# Altium PCB MSXIV_DC-DC_Converter.PcbDoc
Units mil, origin at the board's own origin, x right, y up, seen from the top; angles counter-clockwise.
Board outline 6574.8 x 2484.25 mil, 2 copper layers (Top Layer, Bottom Layer); 34 components, 17 nets, 153 pads, 173 vias.
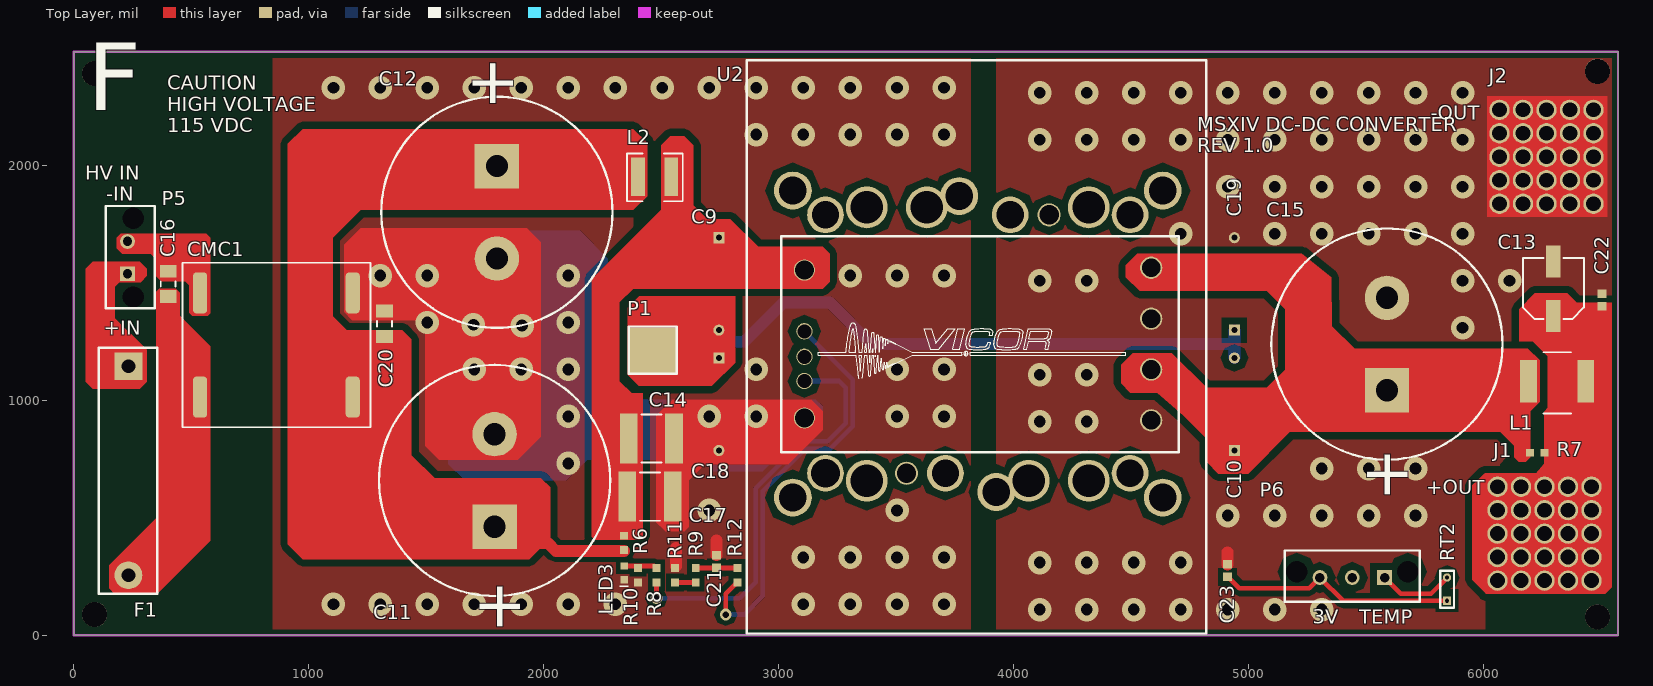
[diagram p0: Top Layer view]
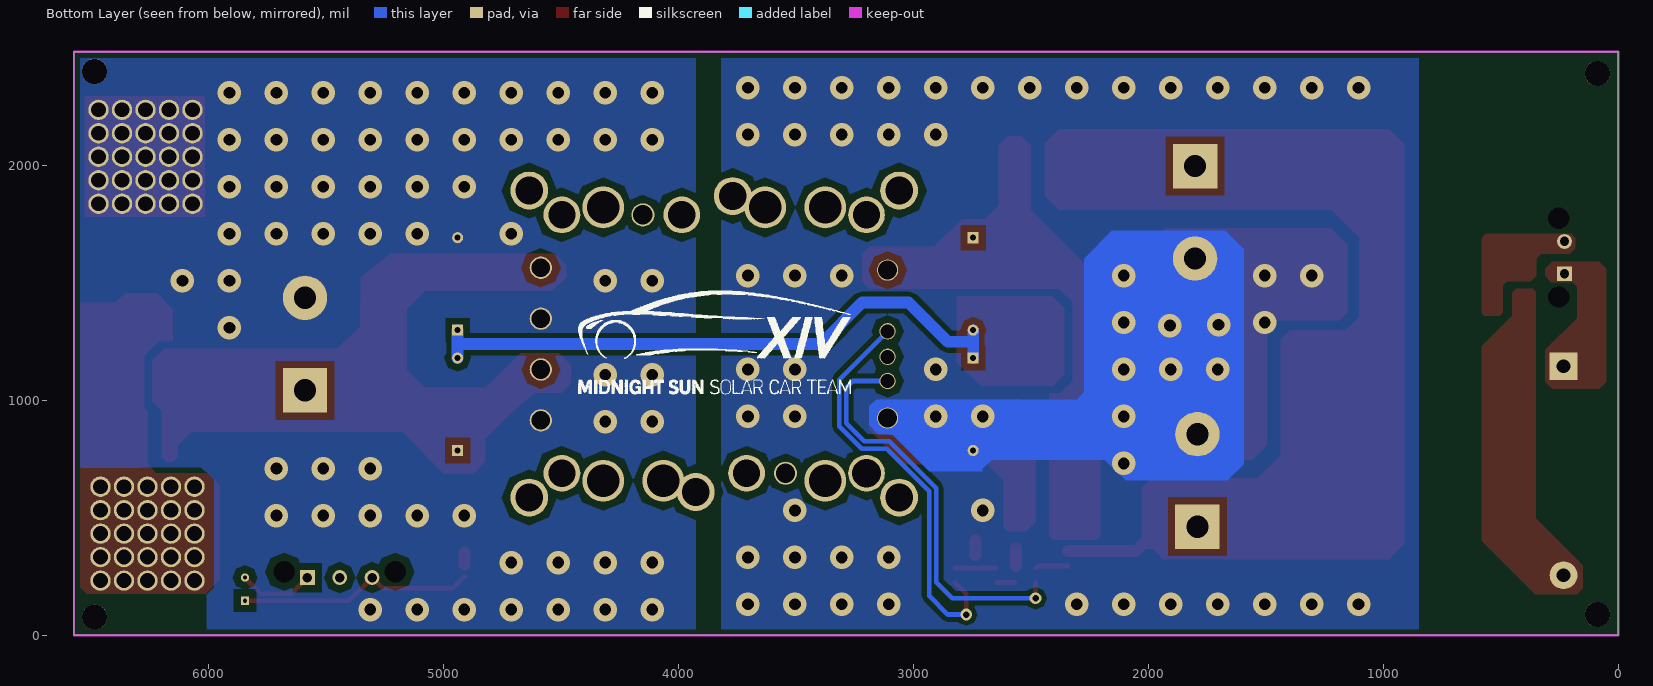
[diagram p1: Bottom Layer view, seen from below]
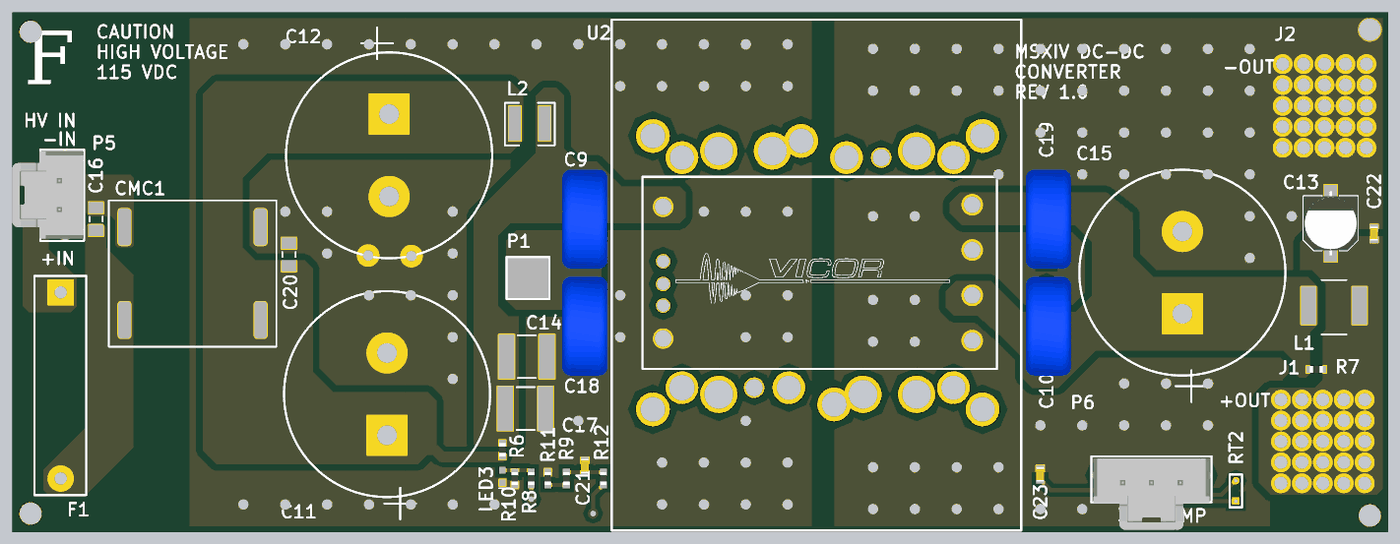
[diagram p2: 3D render of the assembled board from above, using the file's embedded part models]

## Layer stack, top to bottom
Top Solder: solder mask 0.4, Solder Resist, Dk 3.5
Top Layer: signal copper 1.4
Dielectric 1: dielectric 12.6, FR-4, Dk 4.8
Bottom Layer: signal copper 1.4
Bottom Solder: solder mask 0.4, Solder Resist, Dk 3.5

## Board outline
0,0 0,2484.25 6574.8,2484.25 6574.8,0

## Design rules (kind name [scope] priority, off if disabled: settings)
Clearance "Stitching HV_GND" [IsStitchingVia and InNet('HV_GND') vs (IsVia and (Not IsStitchingVia)) Or IsPad] p1: gap=5 ignorepadtopadclearanceinfootprint=FALSE
Clearance [All] p2: gap=10 ignorepadtopadclearanceinfootprint=FALSE except(0: Arc-Hole Track-Hole SMDPad-Hole THPad-Hole Via-Hole Fill-Hole Poly-Hole Region-Hole Text-Hole; 20: Arc-Fill Arc-Poly Arc-Region Track-Fill Track-Poly Track-Region SMDPad-Fill SMDPad-Poly SMDPad-Region Via-Fill Via-Poly Via-Region; 30: THPad-Fill THPad-Poly THPad-Region Fill-Fill Fill-Poly Fill-Region Poly-Poly Poly-Region Region-Region)
Height [All] p1: minheight=0 maxheight=1968.5 prefheight=500
PolygonConnect [All] p1: connectstyle=Direct reliefconductorwidth=10 reliefentries=4 polygonreliefangle="90 Angle" airgapwidth=10
RoutingVias [All] p1: holewidth=28 width=50 viastyle="Through Hole" minholewidth=28 minwidth=50 maxholewidth=28 maxwidth=50
SolderMaskExpansion [All] p1: expansion=4
Width [All] p1: maxlimit=100 minlimit=10 preferedwidth=10 minimp=50.000000 maximp=50.000000 favimp=50.000000
29 further rules are at their usual default settings.

## Classes and differential pairs
net class HV: HV_GND NetC9_1 NetC11_1 NetF1_1
net class 20A: GND NetC10_1 NetC13_1
net class 5A: HV_GND NetC9_1 NetC11_1 NetF1_1

## Components (designator, comment, footprint, x,y, rotation, side; value= is the part's Value field where it differs from the comment)
C9 "CAP CER 4700PF 400VAC Y5V RADIAL" "CAP 4700PF 400VAC Y5V RADIAL" 2746.06,1692.91 r270 top value=4700pF
C10 "CAP CER 4700PF 400VAC Y5V RADIAL" "CAP 4700PF 400VAC Y5V RADIAL" 4940.94,787.4 r90 top value=4700pF
C11 "CAP ALUM 1000UF 20% 200V SNAP" "CAP ALUM 1000uF 200V" 1791.34,462.6 r90 top
C12 "CAP ALUM 1000UF 20% 200V SNAP" "CAP ALUM 1000uF 200V" 1801.18,1998.03 r270 top
C13 "EEE-1HA4R7NP" "CAP ALUM 6.3MM RADIAL SMD" 6299.21,1476.38 r90 top
C14 "CAP CER 1UF 200V X7R 2220" "CAP, 2220" 2458.66,838.58 r0 top
C15 "CAP ALUM 15000UF 20% 25V SNAP" "CAP ALUM 1000uF 200V" 5590.55,1043.31 r90 top
C16 "CAP CER 0.1UF 200V X7R 1206" "CAP, 1206" 401.57,1496.06 r90 top
C17 "CAP CER 1UF 200V X7R 2220" "CAP, 2220" 2452.76,590.55 r0 top
C18 "CAP CER 4700PF 400VAC Y5V RADIAL" "CAP 4700PF 400VAC Y5V RADIAL" 2746.06,1181.1 r270 top value=4700pF
C19 "CAP CER 4700PF 400VAC Y5V RADIAL" "CAP 4700PF 400VAC Y5V RADIAL" 4940.94,1299.21 r90 top value=4700pF
C20 "CAP CER 0.1UF 200V X7R 1206" "CAP, 1206" 1322.83,1326.77 r90 top
C21 "CAP CER 0.1UF 50V 10% X7R 0603" "CAP, 0603" 2736.22,314.96 r90 top
C22 "CAP CER 10uF 25V 20% X5R 0603" "CAP, 0603" 6505.91,1427.17 r90 top
C23 "CAP CER 0.1UF 50V 10% X7R 0603" "CAP, 0603" 4911.42,275.59 r90 top
CMC1 "CM Choke" "LCCI 50 Common mode choke" 862.2,1236.22 r0 top
F1 "FUSE 420VAC/DC 5X20 FA 8A" "FUSE 420VAC/DC 5X20 FA 8A" 232.28,1145.67 r0 top
J1 "TERM PWR ELEMENT SHANK M8 25PIN" "TERM PWR ELEMENT SHANK M8 25PIN" 6461.42,533.07 r0 top
J2 "TERM PWR ELEMENT SHANK M8 25PIN" "TERM PWR ELEMENT SHANK M8 25PIN" 6469.69,2137.4 r0 top
L1 "IND 820NH 16A 6 MOHM SMD" "IND 820NH 16A 6 MOHM SMD" 6192.91,1082.68 r0 top
L2 "IND 1UH 5A 12MOHM SMD" "IND 1UH 5A 12MOHM SMD" 2372.05,1870.08 r0 top
LED3 "LED GREEN CLEAR 2V 0603" LED_0603 2342.13,293.31 r270 top
P1 "5mm PAD" "5MM PAD" 2464.57,1212.6 r0 top
P5 "CONN 2POS ULTRA-FIT 0.138\"" "CONN, 2POS ULTRA-FIT" 228.35,1539.37 r90 top
P6 "CONN 3POS ULTRA-FIT 0.138\"" "CONN, 3POS ULTRA-FIT" 5580.71,246.06 r180 top
R6 "RES 1 OHM 5% 1/10W 0603" "RES, 0603" 2342.52,393.7 r90 top
R7 "RES 1 OHM 5% 1/10W 0603" "RES, 0603" 6230.31,777.56 r0 top
R8 "RES 330 OHM 1% 1/10W 0603" "RES, 0603" 2480.31,255.91 r90 top
R9 "RES 10K OHM 1% 1/10W 0603" "RES, 0603" 2647.64,255.91 r270 top
R10 "RES 54.9K OHM 1% 1/10W 0603" "RES, 0603" 2401.57,255.91 r270 top
R11 "RES 15.6K OHM 0.1% 1/10W 0402" "RES, 0603" 2559.06,255.91 r270 top
R12 "RES 0.0 OHM 1/4W 0603" "RES, 0603" 2824.8,255.91 r270 top
RT2 "10K NTC" "NTC THERMISTOR BEAD" 5846.46,147.64 r90 top
U2 "DCDC VICOR CONVERTER 15V 240W - DCM3623TA5N17B4T70" "IC, DCDC CONVERTER DCM3623TA5N17B4T70" 3848.43,1240.16 r0 top locked

## Footprints (in the part's own frame and the unit in brackets; to place one, negate y for a bottom-side part, rotate by r counter-clockwise, add the part's x,y. Pads: shape width x height; smd on the part's side, far side on the other; paste and mask are expansions set on the pad)
"5MM PAD" [mm] "5mmx5mm Pad for EMI GROUND"
  rect 5x5 smd: 1(0,0)
  silkscreen extent -2.6,-2.5 2.6,2.6
"CAP 4700PF 400VAC Y5V RADIAL" [mm] "4700pF ±20% 400VAC Ceramic Capacitor Y5V (F) Radial, Disc"
  rect 1.2x1.2 hole 0.65: 1(0,0)
  round 1.2 hole 0.65: 2(10,0)
  body extent -1,-3 11,2.5, height 16
"CAP ALUM 6.3MM RADIAL SMD" [mm] "Aluminum Electrolytic Capacitor, Body 6.50x6.50x5.50mm, IPC Low Density"
  rect 3.45x1.55 smd: 1(-2.95,0) 2(2.95,0)
  silkscreen extent -3.3,-3.3 3.3,3.3, body extent -3.9,-3.3 3.9,3.3, height 5.5
"CAP ALUM 1000uF 200V" [mm] "Footprint for 1000µF 200V Aluminum Electrolytic Capacitors Radial, Can - Snap-In 199mOhm @ 120Hz 3000 Hrs @ 85°C"
  rect 4.8x4.8 hole 2.4: 1(0,0)
  round 4.8 hole 2.4: 2(10,0)
  silkscreen extent -7.5,-12.5 17.5,12.5, body extent -8,-12.99 18,13, height 45
"CAP, 0603" [mm] "Chip Capacitor, 2-Leads, Body 1.60x0.81mm, IPC Medium Density"
  rect 0.9x1 smd mask+0.076: 1(-0.675,0) 2(0.675,0)
  body extent -0.87,-0.48 0.87,0.48, height 0.9
"CAP, 1206" [mm] "Chip Capacitor, 2-Leads, Body 3.20x1.60mm, IPC Medium Density"
  rect 1.4x1.8 smd: 1(-1.375,0) 2(1.375,0)
  silkscreen extent -0.3,-0.8 0.3,0.8, body extent -1.68,-0.87 1.67,0.87, height 1.8
"CAP, 2220" [mm] "Chip Capacitor, 2-Leads, Body 5.70x5.00mm, IPC Medium Density"
  rect 1.9x5.4 smd: 1(-2.45,0) 2(2.45,0)
  silkscreen extent -1.1,-2.6 1.1,2.6, body extent -3.05,-2.7 3.05,2.7, height 2.3
"CONN, 2POS ULTRA-FIT" [mm] "2 Positions Header, Shrouded Connector 0.138\" (3.50mm) Through Hole Gold"
  rect 1.6x1.6 hole 1.02: 1(0,0)
  round 1.6 hole 1.02: 2(3.5,0)
  round 1.6 hole 2.3: ""(-2.5,-0.63) ""(6,-0.63)
  silkscreen extent -3.74,-2.93 7.33,2.37, body extent -3.48,-2.87 7.12,5.79, height 13.85
"CONN, 3POS ULTRA-FIT" [mm]
  rect 1.6x1.6 hole 1.02: 1(0,0)
  round 1.6 hole 1.02: 2(3.5,0) 3(7,0)
  round 0 hole 2.3: ""(-2.5,-0.63) ""(9.5,-0.63)
  silkscreen extent -3.8,-2.93 10.8,2.62, body extent -3.55,-2.67 10.55,5.99, height 13.85
"FUSE 420VAC/DC 5X20 FA 8A" [mm] "8A 420V AC 420V DC Fuse Cartridge, Ceramic Holder Cartridge, Non-Standard"
  rect 3x3 hole 1.5: 1(0,0)
  round 3 hole 1.5: 2(0,-22.6)
  silkscreen extent -3.2,-24.6 3.1,2, body extent -3.2,-24.6 3.1,2, height 8.13
"IC, DCDC CONVERTER DCM3623TA5N17B4T70" [mm]
  round 2.28 hole 2.03: A1(-18.75,8) E1(-18.75,-8)
  round 2.41 hole 2.03: A'2(18.75,8.25) B'2(18.75,2.75) C'2(18.75,-2.75) D'2(18.75,-8.25)
  round 1.77 hole 1.52: B1(-18.75,1.38) C1(-18.75,-1.38) D1(-18.75,-4)
  round 4.1 hole 3: ""(-20,-16.6) ""(-20,16.6) ""(-2,16) ""(2,-16) ""(20,-16.6) ""(20,16.6)
  round 2.5 hole 3.1 unplated: ""(-16.47,-13.97)
  round 3.97 hole 2.95: ""(-16.47,-13.97) ""(-16.47,13.97) ""(-3.5,-13.97) ""(3.5,13.97) ""(16.47,-13.97) ""(16.47,13.97)
  round 4.52 hole 3.5: ""(-12,-14.78) ""(-12,14.78) ""(-12,14.78) ""(-5.5,14.78) ""(5.5,-14.78) ""(12,-14.78) ""(12,14.78)
  round 2.5 hole 2.1: ""(-7.71,-13.97) ""(7.71,13.97)
  silkscreen extent -25,-31.3 24.7,30.7, body extent -21.25,-11.7 21.75,11.64, height 8
"IND 1UH 5A 12MOHM SMD" [mm] "IND 1UH 5A 12MOHM SMD -Semi-shielded"
  rect 1.5x4.2 smd: 1(0.75,2.1) 2(4.35,2.1)
  silkscreen extent -0.45,-0.55 5.6,4.62
"IND 820NH 16A 6 MOHM SMD" [mm] "820nH Shielded Molded Inductor 16A 6mOhm Max Nonstandard"
  rect 1.8x4.6 smd: 1(0,0) 2(6.2,0)
  silkscreen extent 1.6,-3.51 4.6,3.11, body extent -0.6,-3.6 6.8,3.2, height 3
"LCCI 50 Common mode choke" [mil] "5.6A CMC 18mm x20mm x 10mm"
  rrect50% 60x175 smd: 1(-325,-222) 2(325,-222) 3(-325,222) 4(325,222)
  silkscreen extent -400,-350 400,350, body extent -400,-350 400,350, height 390
LED_0603 [mm]
  rect 0.8x0.8 smd: 1(-0.05,0.01) 2(1.45,0.01)
  silkscreen extent 2.13,-0.46 2.13,0.45, body extent -0.09,-0.39 1.51,0.41, height 0.8
"NTC THERMISTOR BEAD" [mm] "NTC Thermistor 10k Bead"
  rect 0.9x0.9 hole 0.45: 1(0,0)
  round 0.9 hole 0.45: 2(2.5,0)
  silkscreen extent -0.75,-0.75 3.25,0.75
"RES, 0603" [mm] "Chip Resistor, 2-Leads, Body 1.60x0.80mm, IPC Medium Density"
  rect 0.85x0.85 smd: 1(-0.775,0) 2(0.775,0)
  body extent -0.8,-0.4 0.8,0.4, height 0.55
"TERM PWR ELEMENT SHANK M8 25PIN" [mm] "25 Pin Shank Terminal M8 Through Hole"
  round 2.2 hole 1.6: 1(-10.16,-7.62) 1(-10.16,-5.08) 1(-10.16,-2.54) 1(-10.16,0) 1(-10.16,2.54) 1(-7.62,-7.62) 1(-7.62,-5.08) 1(-7.62,-2.54) 1(-7.62,0) 1(-7.62,2.54) 1(-5.08,-7.62) 1(-5.08,-5.08) 1(-5.08,-2.54) 1(-5.08,0) 1(-5.08,2.54) 1(-2.54,-7.62) 1(-2.54,-5.08) 1(-2.54,-2.54) 1(-2.54,0) 1(-2.54,2.54) 1(0,-7.62) 1(0,-5.08) 1(0,-2.54) 1(0,0) 1(0,2.54)
  Top Layer region: -11.5,4 1.5,4 1.5,-9 -11.5,-9
  silkscreen extent -12,4 -12,4

## Part data
C9 C10 C18 C19: "4700pF ±20% 400VAC Ceramic Capacitor Y5V (F) Radial, Disc", Manufacturer=KEMET, Manufacturer Part Number=C951U472MVVDBA7317, Operating Temperature="-40°C ~ 125°C", Package / Case="Radial, Disc", Ratings="X1, Y1", Supplier Part Number 1=399-9517-1-ND, Temperature Coefficient="Y5V (F)", Tolerance=±20%, Voltage - Rated=400VAC, Applications=Safety, Category=Capacitors, ComponentLink1Description=https://search.kemet.com/component-edge/download/datasheet/C951U472MVVDBA7317.pdf, ComponentLink1URL=https://search.kemet.com/component-edge/download/datasheet/C951U472MVVDBA7317.pdf, Failure Rate=-, Features=-, Height - Seated (Max)=-, Lead Spacing="0.394\" (10.00mm)", Lead Style="Formed Leads - Kinked", Mounting Type="Through Hole", Packaging="Cut Tape (CT)", Part Status=Active, Pricing 1="1=1.12, 10=0.795, 100=0.5234, 500=0.38772 (CAD)", RoHS="RoHS Compliant", Size / Dimension="0.472\" Dia (12.00mm)", Stock 1=9713, Supplier 1=Digi-Key, Thickness (Max)=-
C11 C12: "CAP RADIAL ALUM 1000UF 20% 200V SNAP", Capacitance=1000µF, ESR (Equivalent Series Resistance)="199mOhm @ 120Hz", Manufacturer 1="Cornell Dubilier Electronics (CDE)", Manufacturer Part Number 1=SLPX102M200C4P3, Package / Case="Radial, Can - Snap-In", Supplier Part Number 1=338-1557-ND, Tolerance=±20%, Voltage - Rated=200V, Mounting Type="Through Hole", Polarization=Polar, Supplier 1=Digi-Key
C13: library part "CAP ALUM 4.7UF 20% 50V SMD", "4.7µF 50V Aluminum Electrolytic Capacitors Radial, Can - SMD 2000 Hrs @ 85°C", Capacitance=4.7uF, Case/Package=Radial, Manufacturer 1=Panasonic, Max Operating Temperature=85°C, Min Operating Temperature=-40°C, Package Quantity=1, Ripple Current=31mA, Supplier Part Number 1=PCE4304CT-ND, Tolerance=20%, Voltage Rating=50V, ComponentLink1Description=https://datasheet.ciiva.com/46374/aba0000ce2-46374373.pdf, ComponentLink1URL=https://datasheet.ciiva.com/46374/aba0000ce2-46374373.pdf, ComponentLink2Description=https://datasheet.ciiva.com/14600/70255710-14600343.pdf, ComponentLink2URL=https://datasheet.ciiva.com/14600/70255710-14600343.pdf, ComponentLink3Description=https://datasheet.ciiva.com/17536/aba0000ce2-17536647.pdf, ComponentLink3URL=https://datasheet.ciiva.com/17536/aba0000ce2-17536647.pdf, ComponentLink4Description=https://datasheet.ciiva.com/24027/aba0000ce2-40801-24027083.pdf, ComponentLink4URL=https://datasheet.ciiva.com/24027/aba0000ce2-40801-24027083.pdf, ComponentLink5Description=https://datasheet.ciiva.com/31414/aba0000ce2-31414684.pdf, ComponentLink5URL=https://datasheet.ciiva.com/31414/aba0000ce2-31414684.pdf, ComponentLink6Description=https://datasheet.ciiva.com/14606/70255710-14606079.pdf, ComponentLink6URL=https://datasheet.ciiva.com/14606/70255710-14606079.pdf, Description 1="CAPACITOR ALUM ELEC, 4.7UF, 50V, 20%, SMD", Diameter=6.3mm, Height=5.4mm, Height - Seated (Max)=0.213inch, Lead Free="Lead Free", Length=5.5mm, Life (Hours)=2000Hour, Manufacturer Part Number 1=EEE-1HA4R7NP, Mount="Surface Mount,PCB", Packaging="Tape and Reel", Pricing 1="1=0.43, 10=0.302, 100=0.1986, 500=0.1471 (USD)", Radiation Hardening=No, REACH SVHC="No SVHC", Ripple Current (AC)=31mA, Stock 1=19771, Supplier 1=Digi-Key, Termination=SMD/SMT, Voltage Rating (DC)=50V, Width=650um
C14 C17: "1µF ±10% 200V Ceramic Capacitor X7R 2220 (5750 Metric)", Capacitance=1µF, Manufacturer="Murata Electronics", Manufacturer Part Number 1=GRM55DR72D105KW01L, Package / Case="2220 (5750 Metric)", Supplier Part Number 1=490-14683-1-ND, Temperature Coefficient=X7R, Tolerance=±10%, Voltage - Rated=200V, Mounting Type 1="Surface Mount, MLCC", Size / Dimension="0.224\" L x 0.197\" W (5.70mm x 5.00mm)", Supplier 1=Digi-Key
C15: "15000µF 25V Aluminum Electrolytic Capacitors Radial, Can - Snap-In 40mOhm 3000 Hrs @ 105°C", Capacitance=15000µF, Manufacturer="Cornell Dubilier Electronics (CDE)", Manufacturer Part Number=SLP153M025C4P3, Supplier Part Number 1=338-1470-ND, Tolerance=±20%, Voltage - Rated=25V, Parameter 1="0.984\" Dia (25.00mm)", Size / Dimension="0.984\" Dia (25.00mm)", Supplier 1=Digi-Key
C16 C20: Capacitance=0.1µF, Manufacturer 1=Manufacturer, Manufacturer Part Number 1=885342208002, Package / Case="1206 (3216 Metric)", Supplier Part Number 1=732-12081-1-ND, Temperature Coefficient=X7R, Tolerance=±10%, Voltage - Rated=200V, Supplier 1=Digi-Key
C21 C23: "0.10µF ±10% 50V Ceramic Capacitor X7R 0603 (1608 Metric)", Capacitance=0.1µF, Manufacturer 1="AVX Corporation", Manufacturer Part Number 1=06035C104KAT2A, Operating Temperature="-55°C ~ 125°C", Package / Case="0603 (1608 Metric)", Ratings=-, Supplier Part Number 1=478-5052-1-ND, Temperature Coefficient=X7R, Tolerance=±10%, Voltage=50V, ComponentLink1Description=http://datasheets.avx.com/X7RDielectric.pdf, ComponentLink1URL=http://datasheets.avx.com/X7RDielectric.pdf, Height - Seated (Max)=-, Lead Spacing=-, Lead Style=-, Mounting Type="Surface Mount, MLCC", Packaging="Cut Tape (CT)", Part Status=Active, Size / Dimension="0.063\" L x 0.032\" W (1.60mm x 0.81mm)", Supplier 1=Digi-Key, Thickness (Max)="0.035\" (0.90mm)"
C22: "10µF ±20% 25V Ceramic Capacitor X5R 0603 (1608 Metric)", Capacitance=10µF, Manufacturer 1="Murata Electronics North America", Manufacturer Part Number 1=GRM188R61E106MA73D, Operating Temperature="-55°C ~ 85°C", Package / Case="0603 (1608 Metric)", Ratings=-, Supplier Part Number 1=490-7202-1-ND, Temperature Coefficient=X5R, Tolerance=±20%, Voltage=25V, ComponentLink1Description=http://www.murata.com/~/media/webrenewal/support/library/catalog/products/capacitor/mlcc/c02e.ashx, ComponentLink1URL=http://www.murata.com/~/media/webrenewal/support/library/catalog/products/capacitor/mlcc/c02e.ashx, Height - Seated (Max)=-, Lead Spacing=-, Lead Style=-, Mounting Type="Surface Mount, MLCC", Packaging="Cut Tape (CT)", Part Status=Active, Size / Dimension="0.063\" L x 0.031\" W (1.60mm x 0.80mm)", Supplier 1=Digi-Key, Thickness (Max)="0.031\" (0.80mm)"
CMC1: library part "COMMON MODE CHOKE 5.6A 2LN SMD", "2 Line Common Mode Choke Surface Mount  5.6A DCR 21mOhm", Current Rating (Max)=5.6A, DC Resistance (DCR) (Max)=21mOhm, Manufacturer 1="Pulse Electronics Power", Manufacturer Part Number 1=P0353NLT, Package=TBD, PartNumber=P0353NL, Supplier Part Number 1=553-1764-1-ND, Filter Type="Power Line", Number of Lines=2, Supplier 1=Digi-Key
F1: "8A 420V AC 420V DC Fuse Cartridge, Ceramic Holder Cartridge, Non-Standard", Manufacturer="Littelfuse Inc.", Manufacturer Part Number=0487008.MXP, Supplier Part Number 1=F6659-ND, Voltage Rating - DC=420V, Fuse Type="Cartridge, Ceramic", Supplier 1=Digi-Key
J1 J2: "25 Pin Shank Terminal M8 Through Hole", Current Rating (Amps)=250A, Manufacturer 1="Wurth Electronics Inc.", Manufacturer Part Number 1=7460719, Supplier Part Number 1=732-3219-ND, Number of Pins=25, Screw Size=M8, Supplier 1=Digi-Key, Terminal Type="Shank Terminal", Termination=Press-Fit
L1: "820nH Shielded Molded Inductor 16A 6mOhm Max Nonstandard", Current Rating (Amps)=16A, DC Resistance (DCR)="6mOhm Max", Inductance=820nH, Manufacturer="ECS Inc.", Manufacturer Part Number=ECS-MPIL0630-R82MC, Package / Case=Nonstandard, Supplier Part Number 1=XC2399CT-ND, Tolerance=±20%, Height - Seated (Max)="0.118\" (3.00mm)", Mounting Type="Surface Mount", Shielding=Shielded, Size / Dimension="0.291\" L x 0.260\" W (7.40mm x 6.60mm)", Supplier 1=Digi-Key
L2: library part "IND 1uH 5A 12MOHM SMD", "1µH Semi-Shielded Wirewound Inductor 5A 12mOhm Nonstandard", Current - Saturation=7.5A, Current Rating (Amps)=5A, DC Resistance (DCR)=12mOhm, Inductance=1µH, Manufacturer 1="Bourns Inc.", Manufacturer Part Number 1=SRN5040TA-1R0M, Package / Case=Nonstandard, Supplier Part Number 1=SRN5040TA-1R0MCT-ND, Tolerance=±20%, Mounting Type="Surface Mount", Shielding=Semi-Shielded, Supplier 1=Digi-Key
LED3: "Green 572nm LED Indication - Discrete 2V 0603 (1608 Metric)", Color=Green, Current - Test=20mA, Lens Color=Colorless, Manufacturer="Wurth Electronics Inc.", Manufacturer Part Number=150060VS75000, Millicandela Rating=40mcd, Package / Case="0603 (1608 Metric)", Supplier Device Package=0603, Supplier Part Number 1=732-4980-1-ND, Voltage - Forward (Vf) (Typ)=2V, Category=Optoelectronics, ComponentLink1Description=http://katalog.we-online.de/led/datasheet/150060VS75000.pdf, ComponentLink1URL=http://katalog.we-online.de/led/datasheet/150060VS75000.pdf, Features=-, Height (Max)=0.80mm, Lens Style/Size="Rectangle with Flat Top, 1.10mm x 0.70mm", Lens Transparency=Clear, Mounting Type="Surface Mount", Packaging="Cut Tape (CT)", Part Status=Active, Pricing 1="1=0.21, 100=0.1617, 500=0.13964 (CAD)", RoHS="RoHS Compliant", Size / Dimension="1.60mm L x 0.80mm W", Stock 1=9408, Supplier 1=Digi-Key, Viewing Angle=140°, Wavelength - Dominant=570nm, Wavelength - Peak=572nm
P1: "5x5mm pad to solder 16 gauge wire"
P5: "2 Positions Header, Shrouded Connector 0.138\" (3.50mm) Through Hole Gold", Current Rating=-, Insulation Color=Black, Manufacturer 1="Molex, LLC", Manufacturer Part Number 1=1722861302, Material Flammability Rating="UL94 V-0", Operating Temperature="-40°C ~ 120°C", Supplier Part Number 1=WM11673-ND, Voltage=400V, ComponentLink1Description=http://www.molex.com/pdm_docs/sd/1722861302_sd.pdf, ComponentLink1URL=http://www.molex.com/pdm_docs/sd/1722861302_sd.pdf, Connector Type=Header, Contact Finish - Mating=Gold, Contact Finish - Post=Tin, Contact Finish Thickness - Mating="30µin (0.76µm)", Contact Finish Thickness - Post="60µin (1.52µm)", Contact Length - Mating=-, Contact Length - Post="0.126\" (3.20mm)", Contact Material="Copper Alloy", Contact Shape=Square, Contact Type="Male Pin", Fastening Type="Latch Holder", Ingress Protection=-, Insulation Height="0.465\" (11.80mm)", Insulation Material="Liquid Crystal Polymer (LCP)", Mated Stacking Heights=26.99mm, Mounting Type="Through Hole", Number of Positions=2, Number of Positions Loaded=All, Number of Rows=1, Overall Contact Length=-, Packaging=Tray, Part Status=Active, Pitch - Mating="0.138\" (3.50mm)", Row Spacing - Mating=-, Series=UltraFit, Shrouding="Shrouded - 4 Wall", Style="Board to Board or Cable", Supplier 1=Digi-Key, Termination="Kinked Pin, Solder"
P6: "3 Positions Header Connector 0.138\" (3.50mm) Through Hole Tin", Current Rating=-, Insulation Color=Black, Manufacturer 1="Molex, LLC", Manufacturer Part Number 1=1722871103, Material Flammability Rating="UL94 V-0", Operating Temperature="-40°C ~ 105°C", Supplier Part Number 1=WM11702-ND, Voltage=400V, ComponentLink1Description=http://www.molex.com/pdm_docs/sd/1722871103_sd.pdf, ComponentLink1URL=http://www.molex.com/pdm_docs/sd/1722871103_sd.pdf, Connector Type=Header, Contact Finish - Mating=Tin, Contact Finish - Post=Tin, Contact Finish Thickness - Mating="60µin (1.52µm)", Contact Finish Thickness - Post="60µin (1.52µm)", Contact Length - Mating=-, Contact Length - Post="0.126\" (3.20mm)", Contact Material="Copper Alloy", Contact Shape=Square, Contact Type="Male Pin", Fastening Type="Latch Holder", Ingress Protection=-, Insulation Height="0.465\" (11.80mm)", Insulation Material="Liquid Crystal Polymer (LCP)", Mated Stacking Heights=26.99mm, Mounting Type="Through Hole", Number of Positions=3, Number of Positions Loaded=All, Number of Rows=1, Overall Contact Length=-, Packaging=Tray, Part Status=Active, Pitch - Mating="0.138\" (3.50mm)", Row Spacing - Mating=-, Series=UltraFit, Shrouding="Shrouded - 4 Wall", Style="Board to Cable/Wire", Supplier 1=Digi-Key, Termination=Solder
R6 R7: "RES SMD 1 OHM 5% 1/10W 0603", Digi-Key Part Number=RHM1.0AZCT-ND, Manufacturer 1="Rohm Semiconductor", Manufacturer Part Number 1=KTR03EZPJ1R0, Package / Case="0603 (1608 Metric)", Power (Watts)="0.1W, 1/10W", Resistance="1 Ohms", Supplier Device Package=0603, Tolerance=±5%, Detailed Description="1 Ohms ±5% 0.1W, 1/10W Chip Resistor 0603 (1608 Metric) Automotive AEC-Q200, High Voltage Thick Film", Supplier 1=Digi-Key, Supplier Part Number 1=RHM1.0AZCT-ND
R8: "330 Ohms ±1% 0.1W, 1/10W Chip Resistor 0603 (1608 Metric) Automotive AEC-Q200, Moisture Resistant Thick Film", Manufacturer="TE Connectivity", Manufacturer Part Number=1-2176339-9, Power=1/10W, Resistance=330, Supplier Part Number 1=A129682TR-ND, Stock 1=0, Supplier 1=Digi-Key
R9: "RES SMD 10K OHM 1% 1/10W 0603", Manufacturer 1=Yageo, Manufacturer Part Number 1=RC0603FR-0710KL, Operating Temperature="-55°C ~ 155°C", Package / Case="0603 (1608 Metric)", Power=1/10W, Resistance=10k, Supplier Device Package=0603, Supplier Part Number 1=311-10.0KHRCT-ND, Temperature Coefficient=±100ppm/°C, Tolerance=±1%, ComponentLink1Description=http://www.yageo.com/documents/recent/PYu-RC_Group_51_RoHS_L_7.pdf, ComponentLink1URL=http://www.yageo.com/documents/recent/PYu-RC_Group_51_RoHS_L_7.pdf, Composition="Thick Film", Failure Rate=-, Height - Seated (Max)="0.022\" (0.55mm)", Packaging="Cut Tape (CT)", Part Status=Active, Size / Dimension="0.063\" L x 0.031\" W (1.60mm x 0.80mm)", Supplier 1=Digi-Key
R10: "54.9k Ohm ±1% 0.1W, 1/10W Chip Resistor 0603 (1608 Metric) Automotive AEC-Q200 Thick Film", Manufacturer="Panasonic Electronic Components", Manufacturer Part Number=ERJ-3EKF5492V, Operating Temperature="-55°C ~ 155°C", Package / Case="0603 (1608 Metric)", Power (Watts)=1/10W, Resistance (Ohms)=54.9k, Supplier Device Package=0603, Supplier Part Number 1=P54.9KHCT-ND, Temperature Coefficient=±100ppm/°C, Tolerance=±1%, Category=Resistors, ComponentLink1Description=https://industrial.panasonic.com/cdbs/www-data/pdf/RDA0000/AOA0000C298.pdf, ComponentLink1URL=https://industrial.panasonic.com/cdbs/www-data/pdf/RDA0000/AOA0000C298.pdf, Composition="Thick Film", Failure Rate=-, Features="Automotive AEC-Q200", Height - Seated (Max)="0.022\" (0.55mm)", Packaging="Cut Tape (CT)", Part Status=Active, Pricing 1="1=0.16, 10=0.031, 100=0.0127, 1000=0.00567, 2500=0.00492 (CAD)", RoHS="RoHS Compliant", Size / Dimension="0.063\" L x 0.031\" W (1.60mm x 0.80mm)", Stock 1=74038, Supplier 1=Digi-Key
R11: library part "RES 5.6K OHM 5% 1/10W 0603", "5.6 kOhms ±5% 0.1W, 1/10W Chip Resistor 0603 (1608 Metric) Moisture Resistant Thick Film", Manufacturer 1=Yageo, Manufacturer Part Number 1=RC0603JR-075K6L, Resistance="5.6 kOhms", Supplier Device Package=0603, Supplier Part Number 1=311-5.6KGRCT-ND, Tolerance=±5%, Supplier 1=Digi-Key
R12: "RES SMD 0.0 OHM JUMPER 1/4W 0603", Manufacturer 1="Vishay Dale", Manufacturer Part Number 1=CRCW06030000Z0EAHP, Operating Temperature="-55°C ~ 155°C", Package / Case="0603 (1608 Metric)", Power (Watts)=1/4W, Resistance=0.0, Supplier Device Package=0603, Supplier Part Number 1=541-0.0SBCT-ND, ComponentLink1Description=http://www.vishay.com/docs/20043/crcwhpe3.pdf, ComponentLink1URL=http://www.vishay.com/docs/20043/crcwhpe3.pdf, Composition="Thick Film", Failure Rate=-, Height - Seated (Max)="0.022\" (0.55mm)", Packaging="Cut Tape (CT)", Part Status=Active, Size / Dimension="0.063\" L x 0.033\" W (1.60mm x 0.85mm)", Supplier 1=Digi-Key
RT2: library part "NTC THERMISTOR 10K 1% BEAD", "NTC Thermistor 10k Bead", B Value Tolerance=±1%, Manufacturer="Murata Electronics North America", Manufacturer Part Number=NXRT15XH103FA1B030, Operating Temperature="-40°C ~ 125°C", Package / Case=Bead, Resistance in Ohms @ 25°C=10k, Supplier Part Number 1=490-8601-ND, B0/50=-, B25/50=3380K, B25/75=-, B25/85=3434K, B25/100=3455K, Category="Sensors, Transducers", ComponentLink1Description=https://www.murata.com/~/media/webrenewal/support/library/catalog/products/thermistor/ntc/r44e.ashx, ComponentLink1URL=https://www.murata.com/~/media/webrenewal/support/library/catalog/products/thermistor/ntc/r44e.ashx, Length - Lead Wire=-, Mounting Type="Through Hole", Packaging=Bulk, Part Status=Active, Pricing 1="1=0.96, 5=0.91, 10=0.792, 25=0.696, 50=0.5784, 100=0.4925, 500=0.42834, 1000=0.3748, 5000=0.33197 (CAD)", Resistance Tolerance=±1%, RoHS="RoHS Compliant", Stock 1=25017, Supplier 1=Digi-Key
U2: "DC DC CONVERTER 15V 240W", Current - Output (Max)=16A, Manufacturer 1="Vicor Corporation", Manufacturer Part Number 1=DCM3623TA5N17B4T70, Operating Temperature="-40°C ~ 105°C", Package / Case="9-DIP Module", Power=240W, Supplier Part Number 1=1470-2950-1-ND, Voltage - Input (Max)=43V, Voltage - Input (Min)=154V, Voltage - Output 1=15V, Voltage - Output 2=-, ComponentLink1Description=http://www.vicorpower.com/documents/datasheets/DCM3623xA5N17B4y7z_ds.pdf, ComponentLink1URL=http://www.vicorpower.com/documents/datasheets/DCM3623xA5N17B4y7z_ds.pdf, Efficiency=92.1%, Mounting Type="Surface Mount", Number of Outputs=1, Packaging="Cut Tape (CT)", Part Status=Active, Size / Dimension="1.52\" L x 0.90\" W x 0.28\" H (38.72mm x 22.8mm x 7.2mm)", Supplier 1=Digi-Key, Type="DCDC Converter Module", Voltage - Output 3=-

## Free pads (board coordinates)
  round 106.3 hole 106.3: ""(88.58,88.58) ""(88.58,2391.73) ""(6486.22,78.74) ""(6486.22,2401.57)

## Via types
v1: diameter 100, hole 50, Top Layer to Bottom Layer, tented both sides, 169 vias
v2: diameter 100, hole 50, Top Layer to Bottom Layer, 2 vias
v3: diameter 50, hole 28, Top Layer to Bottom Layer, tented both sides, 2 vias

## Nets (pads, with @x,y where several pads share a name; then routed paths per layer and width w, separated by ;. In a path a pad name is that pad's centre, name@x,y a point inside that pad or via, vN(x,y) a via of type N, cw(c..) or ccw(c..) an arc to the next point about the centre after c; other vN are vias at no path point)
DCDC_TEMP: P6.1 RT2.2 | length 322.4
  Top Layer w20: P6.1 5649.13,177.64 5778.03,177.64 RT2.2
EMI_GND: C9.2 C10.2 C18.1 C19.1 P1.1 | length 2573.8
  Bottom Layer w50: C18.1 2746.06,1250 ; C9.2 2746.06,1250 ; C10.2 4940.94,1240.16 ; C19.1 4940.94,1240.16 ; 2746.06,1250 2854.33,1250 3021.65,1417.32 3218.5,1417.32 3395.67,1240.16 4940.94,1240.16
GND: C13.2 C15.2 C19.2 C22.2 C23.2 J2.1 pad.@6486.22,2401.57 U2.B'2 U2.D'2 | length 52.2
  Top Layer w50: C23.2 4911.42,354.33
  other v1: 4112.5,110 4112.5,110 4312.5,110 4312.5,110 4512.5,110 4512.5,110 4712.5,110 4712.5,110 4912.5,110 4912.5,110 5112.5,110 5112.5,110 5312.5,110 4112.5,310 4112.5,310 4312.5,310 4312.5,310 4512.5,310 4512.5,310 4712.5,310 4712.5,310 4912.5,510 4912.5,510 5112.5,510 5312.5,510 5512.5,510 5712.5,510 5712.5,510 5312.5,710 5312.5,710 5512.5,710 5512.5,710 5712.5,710 5712.5,710 4112.5,910 4112.5,910 4312.5,910 4312.5,910 4112.5,1110 4112.5,1110 4312.5,1110 4312.5,1110 5912.5,1310 4112.5,1510 4112.5,1510 4312.5,1510 4312.5,1510 5912.5,1510 5912.5,1510 6112.5,1510 6112.5,1510 4712.5,1710 5112.5,1710 5312.5,1710 5312.5,1710 5512.5,1710 5512.5,1710 5712.5,1710 5712.5,1710 5912.5,1710 5912.5,1710 4912.5,1910 4912.5,1910 5112.5,1910 5112.5,1910 5312.5,1910 5312.5,1910 5512.5,1910 5512.5,1910 5712.5,1910 5712.5,1910 5912.5,1910 5912.5,1910 4112.5,2110 4112.5,2110 4312.5,2110 4312.5,2110 4512.5,2110 4512.5,2110 4712.5,2110 4712.5,2110 4912.5,2110 4912.5,2110 5112.5,2110 5112.5,2110 5312.5,2110 5312.5,2110 5512.5,2110 5512.5,2110 5712.5,2110 5712.5,2110 5912.5,2110 5912.5,2110 4112.5,2310 4112.5,2310 4312.5,2310 4312.5,2310 4512.5,2310 4512.5,2310 4712.5,2310 4712.5,2310 4912.5,2310 4912.5,2310 5112.5,2310 5112.5,2310 5312.5,2310 5312.5,2310 5512.5,2310 5512.5,2310 5712.5,2310 5712.5,2310 5912.5,2310 5912.5,2310
HV_GND: C11.2 C12.2 C14.2 C17.2 C18.2 C20.2 C21.2 CMC1.4 LED3.2 R10.2 R11.1 U2.E1 | length 139.8
  Top Layer w50: R11.1@2564.06,294.45 2564.06,372.2 ; C21.2 2736.22,403.54
  other v1: 1105,132 1305,132 1505,132 1705,132 1905,132 2105,132 2305,132 3105,132 3305,132 3505,132 3705,132 3105,332 3305,332 3505,332 3705,332 2705,532 3505,532 2105,732 2105,932 2705,932 2905,932 3505,932 3705,932 1705,1132 1905,1132 2105,1132 2905,1132 3505,1132 3705,1132 1505,1332 2105,1332 1305,1532 1505,1532 2105,1532 3305,1532 3505,1532 3705,1532 2905,2132 3105,2132 3305,2132 3505,2132 3705,2132 1105,2332 1305,2332 1505,2332 1705,2332 1905,2332 2105,2332 2305,2332 2505,2332 2705,2332 2905,2332 3105,2332 3305,2332 3505,2332 3705,2332
  other v2: 1908,1319 1701,1322
LDO_3V: C23.1 P6.3 RT2.1 | length 1015.2
  Top Layer w20: C23.1 4913.39,249.02 4962.4,200 5259.06,200 P6.3 5403.54,147.64 RT2.1
NetC9_1: C9.1 C14.1 C17.1 L2.2 R6.2 U2.A1
NetC10_1: C10.1 C15.1 L1.1 R7.1 U2.A'2 U2.C'2
NetC11_1: C11.1 C12.1 C20.1 CMC1.2 L2.1 R6.1 | length 617
  Top Layer w50: C11.1@1795.28,527.56 1929.13,393.7 2017.72,393.7 2052.2,359.21 R6.1@2342.52,359.21
NetC13_1: C13.1 C22.1 J1.1 L1.2 R7.2
NetC16_1: C16.1 CMC1.1 F1.2
NetC16_2: C16.2 CMC1.3 P5.2 | length 490.5
  Top Layer w50: P5.2 372.29,1677.17 401.57,1647.88 C16.2 401.77,1550 502.93,1550 537.2,1515.72 CMC1.3
NetC21_1: C21.1 R9.1 R12.1 | length 177.2
  Top Layer w20: R9.1 R12.1
NetF1_1: F1.1 P5.1
NetLED3_1: LED3.1 R8.2 R10.1 | length 141.5
  Top Layer w20: LED3.1 2401.57,295.28 2471.46,295.28 R8.2
NetR8_1: R8.1 U2.D1 | length 1756.3
  Top Layer w20: v3(2480.31,157.48) R8.1
  Bottom Layer w20: v3(2480.31,157.48) 2834.65,157.48 2903.54,226.38 2903.54,626.86 3102.66,825.98 3208.78,825.98 3286.5,903.7 3286.5,1054.06 3257.87,1082.68 U2.D1
NetR9_2: R9.2 R11.2 | length 78.7
  Top Layer w20: R11.2@2568.9,225.39 R9.2
NetR12_2: R12.2 U2.B1 | length 1780.9
  Top Layer w20: v3(2775.59,88.58) 2775.59,176.18 R12.2
  Bottom Layer w20: v3(2775.59,88.58) 2854.33,88.58 2933.54,167.8 2933.54,614.44 3113.29,794.19 3219.41,794.19 3316.5,891.27 3316.5,1088.23 U2.B1
pads on no net: P5. P6. P6.2 U2. U2.C1

## Polygon pours and split planes (outlines as drawn)
GND on Top Layer "Top Layer-GND" (solid, remove dead copper, pour order 8): 6548,2480.31 3927.17,2480.32 3927.17,9.84 3937.01,0 6548,0
HV_GND on Top Layer "Top Layer-HV_GND" (solid, pour order 4): 847,2480.31 847,0 3818.9,0 3818.9,2480.32
GND on Bottom Layer "Bottom Layer-GND" (solid, remove dead copper, pour order 10): 6547,2480.31 3927.17,2480.32 3927.17,9.84 3937.01,0 6547,0
HV_GND on Bottom Layer "Bottom Layer-HV_GND" (solid, pour order 6): 848,2480.31 848,0 3818.9,0 3818.9,2480.32

## Keep-outs
Keep-Out Layer:
  lines w10: 0,0 6574,0 6574,2484.25 0,2484.25 0,0

## Other copper
Top Layer:
  pour cut-out: 6010,25 6434,25 6434,109 6464,139 6428.57,174.43 6010,174.43
  pour cut-out: 6099.42,757.87 6070,728.46 6070,723 6136,723 6140,719
  pour cut-out: 2381.89,1778.55 2381.89,1741.11 2382,1741 2465.47,1824.47 2467.53,1824.47 2467.53,1848.47 2464,1852
  region net NetC16_2: 200,1710 183,1693 183,1648 206,1625 327,1625 349,1603 349,1530 371,1508 475,1508 492,1491 492,1373 504,1361 571,1361 581,1371 581,1693 564,1710
  region net NetF1_1: 280,1590 310,1560 310,1530 284,1504 194,1504 175,1485 175,1350 310,1215 310,1080 280,1050 80,1050 50,1080 50,1560 80,1590
  region net NetC16_1: 362.8,1475 350,1462.2 350,1352.76 350,497.64 187.01,334.65 150,297.64 150,200 175,175 352.17,175 580.71,403.54 580.71,1230.31 450,1361.02 450,1459.45 434.45,1475
  region net HV_GND: 2549.21,1003.94 2480.31,935.04 2480.31,482.28 2519.69,442.91 2598.43,442.91 2618.11,462.6 2618.11,659.45 2687.01,728.35 3041.34,728.35 3188.98,875.98 3188.98,954.72 3139.76,1003.94 2992.13,1003.94
  region net NetC10_1: 4527.56,1624.02 4478.35,1574.8 4478.35,1525.59 4537.4,1466.54 5078.74,1466.54 5157.48,1387.8 5157.48,1131.89 5078.74,1053.15 4822.83,1053.15 4675.2,1200.79 4507.87,1200.79 4458.66,1151.57 4458.66,1072.84 4498.03,1033.46 4611.92,1033.46 4724.41,935.04 4822.83,836.61 4822.83,738.19 4872.05,688.98 5000,688.98 5177.16,866.14 6072.83,866.14 6131.89,807.09 6131.89,757.87 6151.57,738.19 6181.1,738.19 6200.79,757.87 6200.79,954.72 6240.16,994.09 6240.16,1171.26 6190.94,1220.47 5452.76,1220.47 5356.25,1316.98 5354.03,1524.13 5228.09,1624.02
  region net NetC13_1: 6013.78,177.17 6519.17,177.17 6547,205 6547,1416 6398.96,1416 6358.27,1456.69 6220.47,1456.69 6153,1389.22 6153,1253 6211,1253 6275,1189 6275,968.09 6259.84,952.93 6259.84,729.75 6224.16,688.98 6003.94,688.98 5954.72,639.76 5954.72,236.22
  region net EMI_GND: 2408,1444 2359,1395 2359,1109 2406,1062 2715.54,1062 2814.96,1161.42 2814.96,1444
  region net NetC9_1: 2220.23,408 2408,408 2421.26,421.26 2421.26,1030.74 2374.77,1030.74 2322.83,1082.68 2322.83,1417.32 2381.89,1476.38 3188.98,1476.38 3218.5,1505.91 3218.5,1624.02 3188.98,1653.54 2913.39,1653.54 2795.28,1771.65 2696.85,1771.65 2637.8,1830.71 2637.8,2086.61 2598.43,2125.98 2539.37,2125.98 2500,2086.61 2500,1811.02 2204.72,1515.75 2204.72,419.63
  region net HV_GND: 1220.47,1732.28 1151.58,1663.39 1151.57,1377.22 1186.29,1342.51 1452.77,1342.51 1496.06,1299.21 1496.06,807.09 1555.12,748.03 1889.76,748.03 1988.19,846.46 1988.19,1673.23 1929.13,1732.28
  region net NetC11_1: 2381.89,2155.51 2440.94,2096.46 2440.95,1870.08 2381.89,1811.02 1220.47,1811.02 1102.36,1692.91 1102.36,1358.27 1161.42,1299.21 1397.64,1299.21 1437.01,1259.84 1437.01,767.72 1535.43,669.29 1988.19,669.29 2027.56,629.92 2027.56,413.39 1938.98,324.8 974.41,324.8 911,388.21 911,2092.1 974.41,2155.51
Bottom Layer:
  pour cut-out: 6005.31,689.18 6008.49,686 6545,686 6545,715 6542.42,712.42 6037.49,715
  pour cut-out: 6005.31,689.18 6005.31,177.41 6005.18,177.28 5977,205.46 5977,664 5980.13,664
  pour cut-out: 6009,25 6434,25 6434,109 6464,139 6428.57,174.43 6009,174.43
  pour cut-out: 6497.98,168.87 6497.98,667.98 6545,715 6549,711 6549,105
  region net HV_GND: 1673.23,1722.44 1594.49,1643.7 1594.49,728.35 1663.39,659.45 2096.46,659.45 2185.04,748.03 2667.32,748.03 2706.69,708.66 2706.69,698.82 2933.07,698.82 3090.55,856.3 3149.61,856.3 3188.98,895.67 3188.98,974.41 3159.45,1003.94 2301.91,1003.94 2273.62,1036.27 2273.62,1604.33 2155.51,1722.44

## Silkscreen, mask and mechanical layers (free items; w line width, h text height)
Top Overlay:
  text "-OUT" at 5777.56,2194.88 h60
  text "F" at 57.48,2142.13 h500
  text "CAUTION / HIGH VOLTAGE / 115 VDC" at 397.48,2142.13 h60
  text "MSXIV DC-DC CONVERTER / REV 1.0" at 4783.46,2057.09 h60
  text "HV IN" at 49.21,1938.98 h60
  text "-IN" at 137.8,1850.39 h60
  text "+IN" at 127.95,1279.53 h60
  text "+OUT" at 5757.87,600.39 h60
  text "3V" at 5275,50 h60
  text "TEMP" at 5472.44,49.21 h60
Bottom Overlay:
  drawing of 32 lines, arcs and shapes, not listed

## Text inside footprints (layer, text, board x,y; h text height)
C11: Top Overlay "+" at 1899.61,9.84 h196.85 r90
C12: Top Overlay "+" at 1698.82,2462.6 h196.85 r270
C15: Top Overlay "+" at 5679.13,570.87 h196.85 r90